# Altium PCB CAN_Interface_Board.PcbDoc
Units mm, origin at the board's own origin, x right, y up, seen from the top; angles counter-clockwise.
Board outline 50 x 50 mm, 2 copper layers (Top Layer, Bottom Layer); 48 components, 37 nets, 249 pads, 4 vias.
Unrouted connection lines stored in the file: 127.
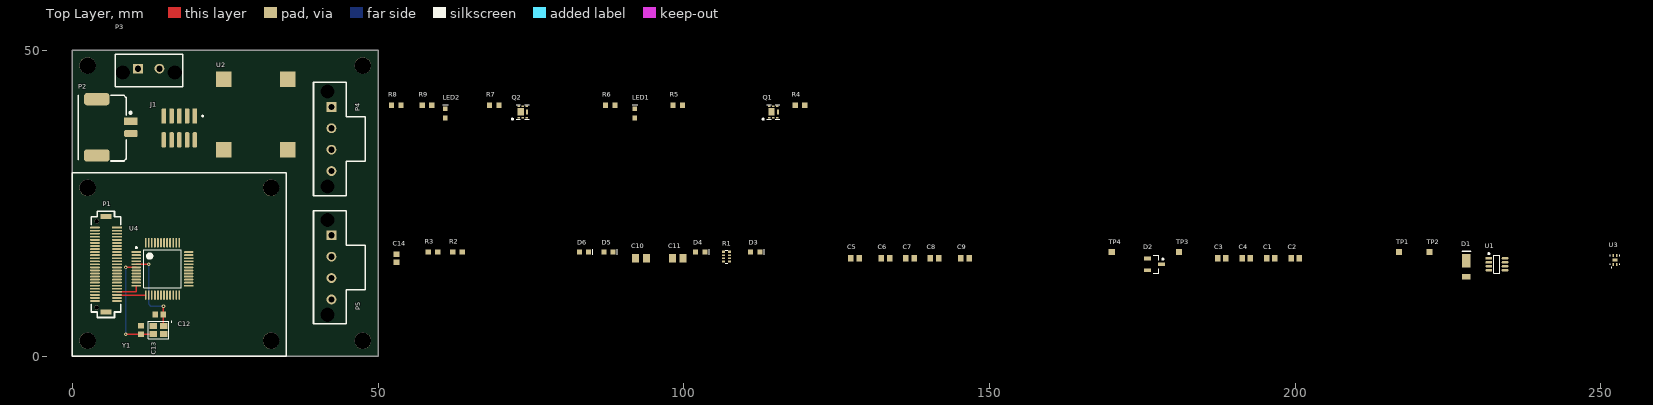
[diagram p0: Top Layer view]
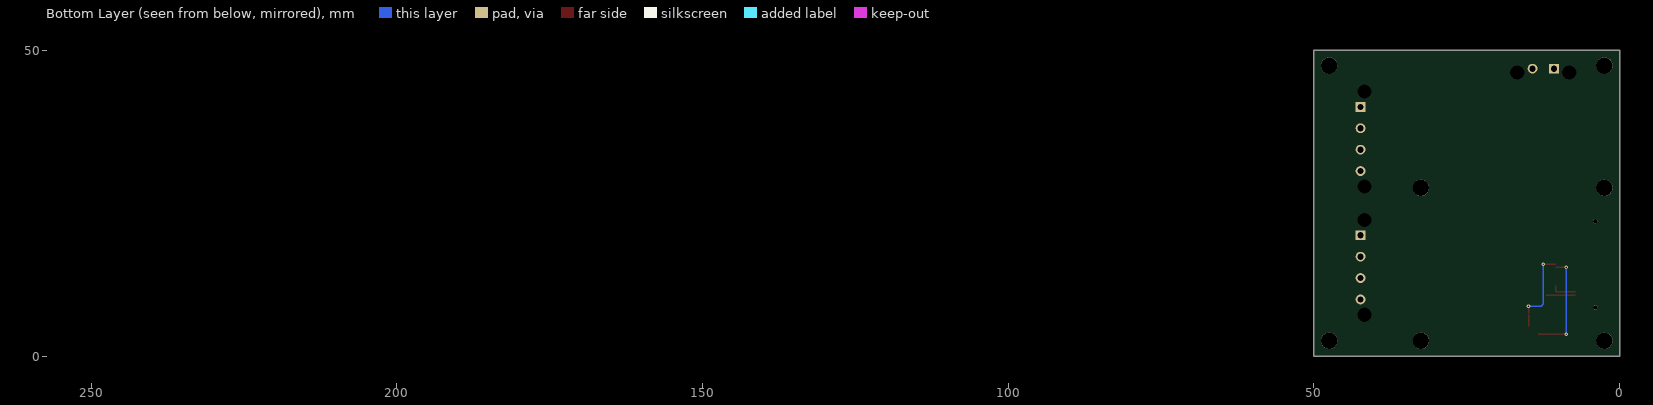
[diagram p1: Bottom Layer view, seen from below]

## Layer stack, top to bottom
Top Solder: solder mask 0.0102, Solder Resist, Dk 3.5
Top Layer: signal copper 0.0356
Dielectric 1: dielectric 0.32, FR-4, Dk 4.8
Bottom Layer: signal copper 0.0356
Bottom Solder: solder mask 0.0102, Solder Resist, Dk 3.5

## Board outline
0,0 0,50 50,50 50,0

## Design rules (kind name [scope] priority, off if disabled: settings)
BoardOutlineClearance [All] p1: gap=0.406 ignorepadtopadclearanceinfootprint=FALSE
Clearance [All] p1: gap=0.152 ignorepadtopadclearanceinfootprint=FALSE except(0: Arc-Hole Track-Hole SMDPad-Hole THPad-Hole Via-Hole Fill-Hole Poly-Hole Region-Hole Text-Hole)
ComponentClearance ComponentClearance_ControllerBoard [InComponent('P1') vs Identifier = 'Controller-Board'] p1: gap=0 collisioncheckmode=3 verticalgap=0 showdistances=FALSE
ComponentClearance ComponentClearance_Standoffs [Identifier = 'Standoff' vs Identifier = 'Controller-Board'] p2: gap=0 collisioncheckmode=3 verticalgap=0 showdistances=FALSE
ComponentClearance [All] p3: gap=0.254 collisioncheckmode=3 verticalgap=0.254 showdistances=FALSE
DiffPairsRouting [All] p1: maxlimit=0.254 minlimit=0.254 mostfreqgap=0.254 toplayer_minwidth=0.381 toplayer_maxwidth=0.381 toplayer_prefwidth=0.381 bottomlayer_minwidth=0.381 bottomlayer_maxwidth=0.381 bottomlayer_prefwidth=0.381 maxuncoupledlength=12.7
HoleSize [All] p1: absolutevalues=TRUE maxlimit=6.3 minlimit=0.3 maxpercent=80.000 minpercent=20.000
MinimumAnnularRing [All] p1: minimumring=0.152
MinimumSolderMaskSliver [All] p1: minsoldermaskwidth=0.3
PolygonConnect [IsPad] p1: connectstyle=Relief reliefconductorwidth=0.254 reliefentries=4 polygonreliefangle="90 Angle" airgapwidth=0.254
PolygonConnect PolygonConnect_NoThermal [Not(IsPad)] p2: connectstyle=Direct reliefconductorwidth=0.254 reliefentries=4 polygonreliefangle="90 Angle" airgapwidth=0.254
RoutingVias [All] p1: holewidth=0.3 width=0.6 viastyle="Through Hole" minholewidth=0.3 minwidth=0.6 maxholewidth=0.711 maxwidth=1.27
SilkToSolderMaskClearance [IsPad] p1: minsilkscreentomaskgap=0.178 clearancetoexposedcopper=TRUE
SolderMaskExpansion [All] p1: expansion=0.102
Width [All] p1: maxlimit=2.54 minlimit=0.152 preferedwidth=0.254
25 further rules are at their usual default settings.

## Classes and differential pairs
component class Pre_Charge_Interface: LED1 LED2 P4 P5 Q1 Q2 R4 R5 R6 R7 R8 R9
component class Master_Controller: C1 C2 C3 C4 C5 C6 C7 C8 C9 C10 C11 C12 C13 C14 D1 D2 D3 D4 D5 D6 J1 P2 P3 R1 R2 R3 TP1 TP2 TP3 TP4 U1 U2 U3 U4 Y1
component class Controller_Board_Interface: P1
differential pair CAN: +CAN_P -CAN_N

## Components (designator, comment, footprint, x,y, rotation, side; value= is the part's Value field where it differs from the comment)
C1 "CAP CER 1UF 50V 10% X7R 0603" "CAP, 0603" 196,16 r0 top
C2 "CAP CER 1UF 50V 10% X7R 0603" "CAP, 0603" 200,16 r0 top
C3 "CAP CER 4.7UF 25V 10% X5R 0603" "CAP, 0603" 188,16 r0 top
C4 "CAP CER 0.1UF 50V 10% X7R 0603" "CAP, 0603" 192,16 r0 top
C5 "CAP CER 0.1UF 50V 10% X7R 0603" "CAP, 0603" 128,16 r0 top
C6 "CAP CER 0.1UF 50V 10% X7R 0603" "CAP, 0603" 133,16 r0 top
C7 "CAP CER 0.1UF 50V 10% X7R 0603" "CAP, 0603" 137,16 r0 top
C8 "CAP CER 0.1UF 50V 10% X7R 0603" "CAP, 0603" 141,16 r0 top
C9 "CAP CER 0.1UF 50V 10% X7R 0603" "CAP, 0603" 146,16 r0 top
C10 "CAP CER 10uF 25V 10% X5R 0805" "CAP, 0805" 93,16 r0 top
C11 "CAP CER 10uF 25V 10% X5R 0805" "CAP, 0805" 99,16 r0 top
C12 "CAP CER 15PF 50V ±5% NPO 0603" "CAP, 0603" 14.229,6.779 r0 top
C13 "CAP CER 15PF 50V ±5% NPO 0603" "CAP, 0603" 11.25,4.25 r270 top
C14 "CAP CER 0.1UF 50V 10% X7R 0603" "CAP, 0603" 53,16 r90 top
D1 "DIODE SCHOTTKY 30V 1A POWERDI123" "DIODE SCHOTTKY 30V 1A POWERDI123" 228,13 r90 top
D2 "DIODE TVS 24VWM 70VC SOT23" SOT23 177,15 r0 top
D3 "LED BLUE CLEAR 2.8V 0603" LED_0603 111,17 r0 top
D4 "LED BLUE CLEAR 2.8V 0603" LED_0603 102,17 r0 top
D5 "LED GREEN CLEAR 2V 0603" LED_0603 87,17 r0 top
D6 "LED RED CLEAR 2V 0603" LED_0603 83,17 r0 top
J1 "CONN 10POS HEADR MALE 0.05\"" "CONN, 10POS 0.05\" Debug Header" 20.04,39.25 r180 top
LED1 "LED GREEN CLEAR 2V 0603" LED_0603 92,39 r90 top
LED2 "LED GREEN CLEAR 2V 0603" LED_0603 61,39 r90 top
P1 "CONN 50POS Bergstak Plug 0.02\"" "CONN, BERGSTAK 50 POS PLUG" 5.5,15 r0 top locked
P2 "Dura-Clik" "CONN, 2POS Dura-Click Vertical" 9.58,38.4 r270 top
P3 "CONN 2POS ULTRA-FIT 0.138\"" "CONN, 2POS ULTRA-FIT" 10.75,47 r0 top
P4 "CONN 4POS ULTRA-FIT 0.138\"" "CONN, 4POS ULTRA-FIT" 42.38,40.75 r270 top
P5 "CONN 4POS ULTRA-FIT 0.138\"" "CONN, 4POS ULTRA-FIT" 42.38,19.75 r270 top
Q1 "MOSFET N-CH 30V 8.7A 2.1W 6-PQFN (2x2)" "MOSFET N-CH 30V 12A 2mmx2mm PQFN" 114,39 r0 top
Q2 "MOSFET N-CH 30V 8.7A 2.1W 6-PQFN (2x2)" "MOSFET N-CH 30V 12A 2mmx2mm PQFN" 73,39 r0 top
R1 "RES ARRAY 510 OHM 5% 4RES" "RES ARRAY 4 POS 0804" 108,16 r0 top
R2 "RES 100K OHM 5% 1/8W 0603" "RES, 0603" 63,17 r0 top
R3 "RES 510 OHM 5% 1/10W 0603" "RES, 0603" 59,17 r0 top
R4 "RES 100 OHM 1% 1/10W 0603" "RES, 0603" 119,41 r0 top
R5 "RES 4.7K OHM 1% 1/10W 0603" "RES, 0603" 99,41 r0 top
R6 "RES 100 OHM 1% 1/10W 0603" "RES, 0603" 88,41 r0 top
R7 "RES 4.7K OHM 1% 1/10W 0603" "RES, 0603" 69,41 r0 top
R8 "RES 10K OHM 1% 1/10W 0603" "RES, 0603" 53,41 r0 top
R9 "RES 10K OHM 1% 1/10W 0603" "RES, 0603" 58,41 r0 top
TP1 "Test Point" "Test Point" 217,17 r90 top
TP2 "Test Point" "Test Point" 222,17 r90 top
TP3 "Test Point" "Test Point" 181,17 r90 top
TP4 "Test Point" "Test Point" 170,17 r90 top
U1 "IC CAN Tranceiver TCAN332DR" TSOP65P280X145-8N 233,15 r0 top
U2 "IC DCDC 3.3V 0.5A 4-SMD" "IC DCDC 3.3V 0.5A 4-SMD" 24.75,45.25 r0 top
U3 "IC REG LDO 3V 0.2A 4-TDFN" "IC REG LDO 3V 0.2A 4-TDFN" 252,15 r0 top
U4 "IC MCU 32BIT 128KB FLASH 48LQFP" TSQFP50P890X890X160-48M 14.75,14.25 r0 top
Y1 "CRYSTAL 32 MHz 8pF 4-SMD" "CX2520DB CRYSTAL" 14.929,4.9 r180 top

## Footprints (in the part's own frame and the unit in brackets; to place one, negate y for a bottom-side part, rotate by r counter-clockwise, add the part's x,y. Pads: shape width x height; smd on the part's side, far side on the other; paste and mask are expansions set on the pad)
"CAP, 0603" [mm] "Chip Capacitor, 2-Leads, Body 1.60x0.81mm, IPC Medium Density"
  rect 0.9x1 smd mask+0.076: 1(-0.675,0) 2(0.675,0)
  body extent -0.87,-0.48 0.87,0.48, height 0.9
"CAP, 0805" [mm] "Chip Capacitor, 2-Leads, Body 2.00x1.25mm, IPC Medium Density"
  rect 1.15x1.4 smd: 1(-0.875,0) 2(0.875,0)
  body extent -1,-0.63 1,0.63, height 1.25
"CONN, 2POS Dura-Click Vertical" [mm] "WM7169CT-ND"
  rect 1.2x2.2 smd: 1(0,0)
  rrect50% 1.2x2.2 smd: 2(2,0)
  rrect50% 2x4.2 smd: 3(-3.6,-5.58) 3(5.6,-5.58)
  silkscreen extent -4.28,-8.6 6.5,0.05, body extent -4.45,-8.63 6.45,0.52, height 8
"CONN, 2POS ULTRA-FIT" [mm] "2 Positions Header, Shrouded Connector 0.138\" (3.50mm) Through Hole Gold"
  rect 1.6x1.6 hole 1.02: 1(0,0)
  round 1.6 hole 1.02: 2(3.5,0)
  round 1.6 hole 2.3: ""(-2.5,-0.63) ""(6,-0.63)
  silkscreen extent -3.74,-2.93 7.33,2.37, body extent -3.48,-2.87 7.12,5.79, height 13.85
"CONN, 4POS ULTRA-FIT" [mm]
  rect 1.6x1.6 hole 1.02: 1(0,0)
  round 1.6 hole 1.02: 2(3.5,0) 3(7,0) 4(10.5,0)
  round 0 hole 2.3: ""(-2.5,-0.63) ""(13,-0.63)
  silkscreen extent -4,-2.93 14.5,5.53, body extent -3.54,-2.78 14.06,5.88, height 13.85
"CONN, 10POS 0.05\" Debug Header" [mm] "Amphenol 10 Positions Header Connector 0.050\" (1.27mm) Surface Mount Gold"
  rect 0.75x2.5 smd: 1(0,0)
  rrect50% 0.75x2.5 smd: 2(0,3.9) 3(1.27,0) 4(1.27,3.9) 5(2.54,0) 6(2.54,3.9) 7(3.81,0) 8(3.81,3.9) 9(5.08,0) 10(5.08,3.9)
  silkscreen extent -1.37,-0.1 -1.17,0.1, body extent -0.63,-0.84 5.72,4.66, height 4.5
"CONN, BERGSTAK 50 POS PLUG" [mm] "Bergstak 50 Position Plug"
  rect 1.6x0.3 smd: 1(1.8,6)
  oval 1.6x0.3 smd: 2(1.8,5.5) 3(1.8,5) 4(1.8,4.5) 5(1.8,4) 6(1.8,3.5) 7(1.8,3) 8(1.8,2.5) 9(1.8,2) 10(1.8,1.5) 11(1.8,1) 12(1.8,0.5) 13(1.8,0) 14(1.8,-0.5) 15(1.8,-1) 16(1.8,-1.5) 17(1.8,-2) 18(1.8,-2.5) 19(1.8,-3) 20(1.8,-3.5) 21(1.8,-4) 22(1.8,-4.5) 23(1.8,-5) 24(1.8,-5.5) 25(1.8,-6) 26(-1.8,-6) 27(-1.8,-5.5) 28(-1.8,-5) 29(-1.8,-4.5) 30(-1.8,-4) 31(-1.8,-3.5) 32(-1.8,-3) 33(-1.8,-2.5) 34(-1.8,-2) 35(-1.8,-1.5) 36(-1.8,-1) 37(-1.8,-0.5) 38(-1.8,0) 39(-1.8,0.5) 40(-1.8,1) 41(-1.8,1.5) 42(-1.8,2) 43(-1.8,2.5) 44(-1.8,3) 45(-1.8,3.5) 46(-1.8,4) 47(-1.8,4.5) 48(-1.8,5) 49(-1.8,5.5) 50(-1.8,6)
  round 0.7 hole 0.7: ""(-1.5,-7.05) ""(-1.5,7.05)
  rect 1.8x0.8 smd: ""(0,-7.8) ""(0,7.8)
  silkscreen extent -2.4,-8.7 2.4,8.7, body extent -2.3,-7.75 2.3,7.75, height 4.2
"CX2520DB CRYSTAL" [mm]
  rect 1.2x1 smd: 1(0,0) 2(1.7,0) 3(1.7,1.3) 4(0,1.3)
  silkscreen extent -1.35,-0.75 2.55,2.05, body extent -0.4,-0.35 2.1,1.65, height 0.5
"DIODE SCHOTTKY 30V 1A POWERDI123" [mm] "Diodes Incorporated DFLS130L-7"
  rect 0.9x1.4 smd: 1(0,0)
  rect 2.2x1.4 smd: 2(2.55,0)
  silkscreen extent 4.15,-0.7 4.15,0.7, body extent 0.1,-1 3.1,1, height 1
"IC DCDC 3.3V 0.5A 4-SMD" [mm] "ROF-78E3.3-0.5SMD-R"
  rect 2.5x2.5 smd: 1(0,0) 2(10.5,0) 3(10.5,-11.5) 4(0,-11.5)
  body extent -1,-12.5 11.5,1, height 4
"IC REG LDO 3V 0.2A 4-TDFN" [mm] "QFN, 4-Leads, Body 1.20x1.60mm, Pitch 0.50mm/1.40mm, Thermal Pad 0.86x0.50mm, IPC Medium Density"
  rect 0.25x0.5 smd: 1(0,0) 2(0.6,0) 3(0.6,1.44) 4(0,1.44)
  rect 0.86x0.5 smd: 5(0.3,0.715)
  silkscreen extent -0.48,-0.56 1.07,1.54, body extent -0.33,-0.11 0.92,1.54, height 0.6
LED_0603 [mm]
  rect 0.8x0.8 smd: 1(-0.05,0.01) 2(1.45,0.01)
  silkscreen extent 2.13,-0.46 2.13,0.45, body extent -0.09,-0.39 1.51,0.41, height 0.8
"MOSFET N-CH 30V 12A 2mmx2mm PQFN" [mm] "PQFN, 6-Leads, Body 2.00x2.00mm, Pitch 0.65mm/0.50mm, Thermal Pad 1.00x1.20mm, IPC Medium Density"
  rect 0.4x0.25 smd: 1(0,0) 2(0.65,0) 3(1.3,0) 4(1.3,1.85) 5(0.65,1.85) 6(0,1.85)
  rect 1x1.2 smd: 7(0.35,0.925)
  rect 0.3x0.79 smd: 8(1.39,0.925)
  silkscreen extent -1.14,-0.38 1.7,2.12, body extent -0.4,-0.13 1.7,1.97, height 1
"RES ARRAY 4 POS 0804" [mm] "Panasonic Electronic Components EXB-N8V511JX"
  rect 0.5x0.35 smd: 1(-1.5,1.05) 4(-1.5,-0.55) 5(-0.5,-0.55) 8(-0.5,1.05)
  rect 0.5x0.25 smd: 2(-1.5,0.5) 3(-1.5,0) 6(-0.5,0) 7(-0.5,0.5)
  silkscreen extent -1.22,-0.82 -0.77,1.33, body extent -1.5,-0.75 -0.5,1.25, height 0.36
"RES, 0603" [mm] "Chip Resistor, 2-Leads, Body 1.60x0.80mm, IPC Medium Density"
  rect 0.85x0.85 smd: 1(-0.775,0) 2(0.775,0)
  body extent -0.8,-0.4 0.8,0.4, height 0.55
SOT23 [mm] "SOT23, 3-Leads, Body 2.9x1.3mm, Pitch 0.95mm, Lead Span 2.3mm - Reverse Pinning, IPC Medium Density"
  rect 1.15x0.6 smd: 1(1.125,0) 2(-1.125,-0.95) 3(-1.125,0.95)
  silkscreen extent -0.2,-1.5 1.48,1.5, body extent -0.7,-1.5 0.7,1.5, height 1.1
"Test Point" [mm]
  rect 1x1 smd paste-2: TP(0,0)
TSOP65P280X145-8N [mm] "TSOP, 8-Leads, Body 2.90x1.60mm, Pitch 0.65mm, IPC Medium Density"
  rect 1.1x0.45 smd: 1(-1.325,0.975)
  oval 1.1x0.45 smd: 2(-1.325,0.325) 3(-1.325,-0.325) 4(-1.325,-0.975) 5(1.325,-0.975) 6(1.325,-0.325) 7(1.325,0.325) 8(1.325,0.975)
  silkscreen extent -1.45,-1.5 0.5,1.87, body extent -1.39,-1.5 1.39,1.5, height 1.45
TSQFP50P890X890X160-48M [mm] "TSQFP, 48-Leads, Body 7.00x7.00mm, Pitch 0.50mm, IPC Low Density"
  rect 1.55x0.3 smd: 1(-4.275,2.75)
  oval 1.55x0.3 smd: 2(-4.275,2.25) 3(-4.275,1.75) 4(-4.275,1.25) 5(-4.275,0.75) 6(-4.275,0.25) 7(-4.275,-0.25) 8(-4.275,-0.75) 9(-4.275,-1.25) 10(-4.275,-1.75) 11(-4.275,-2.25) 12(-4.275,-2.75) 25(4.275,-2.75) 26(4.275,-2.25) 27(4.275,-1.75) 28(4.275,-1.25) 29(4.275,-0.75) 30(4.275,-0.25) 31(4.275,0.25) 32(4.275,0.75) 33(4.275,1.25) 34(4.275,1.75) 35(4.275,2.25) 36(4.275,2.75)
  oval 0.3x1.55 smd: 13(-2.75,-4.275) 14(-2.25,-4.275) 15(-1.75,-4.275) 16(-1.25,-4.275) 17(-0.75,-4.275) 18(-0.25,-4.275) 19(0.25,-4.275) 20(0.75,-4.275) 21(1.25,-4.275) 22(1.75,-4.275) 23(2.25,-4.275) 24(2.75,-4.275) 37(2.75,4.275) 38(2.25,4.275) 39(1.75,4.275) 40(1.25,4.275) 41(0.75,4.275) 42(0.25,4.275) 43(-0.25,4.275) 44(-0.75,4.275) 45(-1.25,4.275) 46(-1.75,4.275) 47(-2.25,4.275) 48(-2.75,4.275)
  silkscreen extent -4.4,-3.1 3.1,3.6, body extent -4.45,-4.45 4.45,4.45, height 1.6

## Part data
C1 C2: "1µF ±10% 50V Ceramic Capacitor X7R 0603 (1608 Metric)", Capacitance=1µF, Manufacturer 1="Taiyo Yuden", Manufacturer Part Number 1=UMK107AB7105KA-T, Operating Temperature="-55°C ~ 125°C", Package / Case="0603 (1608 Metric)", Ratings=-, Supplier Part Number 1=587-3247-1-ND, Temperature Coefficient=X7R, Tolerance=±10%, Voltage=50V, ComponentLink1Description=http://www.yuden.co.jp/productdata/catalog/en/mlcc_all_e.pdf, ComponentLink1URL=http://www.yuden.co.jp/productdata/catalog/en/mlcc_all_e.pdf, Height - Seated (Max)=-, Lead Spacing=-, Lead Style=-, Mounting Type="Surface Mount, MLCC", Packaging="Cut Tape (CT)", Part Status=Active, Size / Dimension="0.063\" L x 0.031\" W (1.60mm x 0.80mm)", Supplier 1=Digi-Key, Thickness (Max)="0.037\" (0.95mm)"
C3: "4.7µF ±10% 25V Ceramic Capacitor X5R 0603 (1608 Metric)", Capacitance=4.7µF, Manufacturer 1="Murata Electronics North America", Manufacturer Part Number 1=GRM188R61E475KE11D, Operating Temperature="-55°C ~ 85°C", Package / Case="0603 (1608 Metric)", Ratings=-, Supplier Part Number 1=490-7203-1-ND, Temperature Coefficient=X5R, Tolerance=±10%, Voltage=25V, ComponentLink1Description=http://www.murata.com/~/media/webrenewal/support/library/catalog/products/capacitor/mlcc/c02e.ashx, ComponentLink1URL=http://www.murata.com/~/media/webrenewal/support/library/catalog/products/capacitor/mlcc/c02e.ashx, Height - Seated (Max)=-, Lead Spacing=-, Lead Style=-, Mounting Type="Surface Mount, MLCC", Packaging="Cut Tape (CT)", Part Status=Active, Size / Dimension="0.063\" L x 0.031\" W (1.60mm x 0.80mm)", Supplier 1=Digi-Key, Thickness (Max)="0.031\" (0.80mm)"
C4 C5 C6 C7 C8 C9 C14: "0.10µF ±10% 50V Ceramic Capacitor X7R 0603 (1608 Metric)", Capacitance=0.1µF, Manufacturer 1="AVX Corporation", Manufacturer Part Number 1=06035C104KAT2A, Operating Temperature="-55°C ~ 125°C", Package / Case="0603 (1608 Metric)", Ratings=-, Supplier Part Number 1=478-5052-1-ND, Temperature Coefficient=X7R, Tolerance=±10%, Voltage=50V, ComponentLink1Description=http://datasheets.avx.com/X7RDielectric.pdf, ComponentLink1URL=http://datasheets.avx.com/X7RDielectric.pdf, Height - Seated (Max)=-, Lead Spacing=-, Lead Style=-, Mounting Type="Surface Mount, MLCC", Packaging="Cut Tape (CT)", Part Status=Active, Size / Dimension="0.063\" L x 0.032\" W (1.60mm x 0.81mm)", Supplier 1=Digi-Key, Thickness (Max)="0.035\" (0.90mm)"
C10 C11: "10µF ±10% 25V Ceramic Capacitor X5R 0805 (2012 Metric)", Capacitance=10µF, Manufacturer="Murata Electronics North America", Manufacturer Part Number=GRM21BR61E106KA73L, Operating Temperature="-55°C ~ 85°C", Package / Case="0805 (2012 Metric)", Ratings=-, Supplier Part Number 1=490-5523-1-ND, Temperature Coefficient=X5R, Tolerance=±10%, Voltage - Rated=25V, Applications="General Purpose", Category=Capacitors, ComponentLink1Description=http://search.murata.co.jp/Ceramy/image/img/A01X/G101/ENG/GRM21BR61E106KA73-01.pdf, ComponentLink1URL=http://search.murata.co.jp/Ceramy/image/img/A01X/G101/ENG/GRM21BR61E106KA73-01.pdf, Features=-, Height - Seated (Max)=-, Lead Spacing=-, Lead Style=-, Mounting Type="Surface Mount, MLCC", Packaging="Cut Tape (CT)", Part Status=Active, Pricing 1="1=0.3, 10=0.214, 100=0.1008, 500=0.07068, 1000=0.05851 (CAD)", RoHS="RoHS Compliant", Size / Dimension="0.079\" L x 0.049\" W (2.00mm x 1.25mm)", Stock 1=1695157, Supplier 1=Digi-Key, Thickness (Max)="0.053\" (1.35mm)"
C12 C13: "15pF ±5% 50V Ceramic Capacitor C0G, NP0 0603 (1608 Metric)", Capacitance=15pF, Manufacturer 1=Yageo, Manufacturer Part Number 1=CC0603JRNPO9BN150, Operating Temperature="-55°C ~ 125°C", Package / Case="0603 (1608 Metric)", Ratings=-, Supplier Part Number 1=311-1060-1-ND, Temperature Coefficient="C0G, NP0", Tolerance=±5%, Voltage=50V, ComponentLink1Description=http://www.yageo.com/documents/recent/UPY-GP_NP0_16V-to-50V_16.pdf, ComponentLink1URL=http://www.yageo.com/documents/recent/UPY-GP_NP0_16V-to-50V_16.pdf, Failure Rate=-, Height - Seated (Max)=-, Lead Spacing=-, Lead Style=-, Mounting Type="Surface Mount, MLCC", Packaging="Cut Tape (CT)", Part Status=Active, Size / Dimension="0.063\" L x 0.031\" W (1.60mm x 0.80mm)", Supplier 1=Digi-Key, Thickness (Max)="0.035\" (0.90mm)"
D1: "Diode Schottky 30V 1A Surface Mount PowerDI™ 123", Capacitance @ Vr, F="76pF @ 10V, 1MHz", Current - Average Rectified (Io)=1A, Current - Reverse Leakage @ Vr="1mA @ 30V", Manufacturer="Diodes Incorporated", Manufacturer Part Number=DFLS130L-7, Operating Temperature - Junction="-40°C ~ 125°C", Package / Case=POWERDI®123, Supplier Device Package="PowerDI™ 123", Supplier Part Number 1=DFLS130LDICT-ND, Voltage - DC Reverse (Vr) (Max)=30V, Voltage - Forward (Vf) (Max) @ If="310mV @ 1A", Category="Discrete Semiconductor Products", ComponentLink1Description=https://www.diodes.com/assets/Datasheets/ds30492.pdf, ComponentLink1URL=https://www.diodes.com/assets/Datasheets/ds30492.pdf, Diode Type=Schottky, Mounting Type="Surface Mount", Packaging="Cut Tape (CT)", Part Status=Active, Pricing 1="1=0.7, 10=0.599, 100=0.447, 500=0.35126, 1000=0.27142 (CAD)", RoHS="RoHS Compliant", Speed="Fast Recovery =< 500ns, > 200mA (Io)", Stock 1=68200, Supplier 1=Digi-Key
D2: "TVS DIODE 24VWM 70VC SOT23", Capacitance @ Frequency="11pF @ 1MHz", Current - Peak Pulse (10/1000µs)="3A (8/20µs)", Manufacturer 1="Nexperia USA Inc.", Manufacturer Part Number 1=PESD1CAN,215, Operating Temperature="-65°C ~ 150°C (TA)", Package / Case="TO-236-3, SC-59, SOT-23-3", Power - Peak Pulse=200W, Power Line Protection=No, Supplier Device Package="SOT-23 (TO-236AB)", Supplier Part Number 1=1727-3817-1-ND, Voltage - Breakdown (Min)=25.4V, Voltage - Clamping (Max) @ Ipp=70V, ComponentLink1Description=http://assets.nexperia.com/documents/data-sheet/PESD1CAN.pdf, ComponentLink1URL=http://assets.nexperia.com/documents/data-sheet/PESD1CAN.pdf, Mounting Type="Surface Mount", Packaging="Cut Tape (CT)", Part Status=Active, Supplier 1=Digi-Key, Type=Zener
D3 D4: "Blue 470nm LED Indication - Discrete 2.8V 0603 (1608 Metric)", Color=Blue, Current - Test=5mA, Lens Color=Colorless, Manufacturer 1="Lite-On Inc.", Manufacturer Part Number 1=LTST-C193TBKT-5A, Millicandela Rating=15mcd, Package / Case="0603 (1608 Metric)", Supplier Device Package="Chip LED", Supplier Part Number 1=160-1827-1-ND, Voltage - Forward (Vf) (Typ)=2.8V, ComponentLink1Description=http://optoelectronics.liteon.com/upload/download/DS22-2004-060/P_100_LTST-C193TBKT-5A.pdf, ComponentLink1URL=http://optoelectronics.liteon.com/upload/download/DS22-2004-060/P_100_LTST-C193TBKT-5A.pdf, Height (Max)=0.45mm, Lens Style/Size="Rectangle with Flat Top, 1.15mm x 0.80mm", Lens Transparency=Clear, Mounting Type="Surface Mount", Packaging="Cut Tape (CT)", Part Status=Active, Size / Dimension="1.60mm L x 0.80mm W", Supplier 1=Digi-Key, Viewing Angle=130°, Wavelength - Dominant=470nm, Wavelength - Peak=468nm
D5 LED1 LED2: "Green 572nm LED Indication - Discrete 2V 0603 (1608 Metric)", Color=Green, Current - Test=20mA, Lens Color=Colorless, Manufacturer="Wurth Electronics Inc.", Manufacturer Part Number=150060VS75000, Millicandela Rating=40mcd, Package / Case="0603 (1608 Metric)", Supplier Device Package=0603, Supplier Part Number 1=732-4980-1-ND, Voltage - Forward (Vf) (Typ)=2V, Category=Optoelectronics, ComponentLink1Description=http://katalog.we-online.de/led/datasheet/150060VS75000.pdf, ComponentLink1URL=http://katalog.we-online.de/led/datasheet/150060VS75000.pdf, Features=-, Height (Max)=0.80mm, Lens Style/Size="Rectangle with Flat Top, 1.10mm x 0.70mm", Lens Transparency=Clear, Mounting Type="Surface Mount", Packaging="Cut Tape (CT)", Part Status=Active, Pricing 1="1=0.21, 100=0.1617, 500=0.13964 (CAD)", RoHS="RoHS Compliant", Size / Dimension="1.60mm L x 0.80mm W", Stock 1=9408, Supplier 1=Digi-Key, Viewing Angle=140°, Wavelength - Dominant=570nm, Wavelength - Peak=572nm
D6: "Red 631nm LED Indication - Discrete 2V 0603 (1608 Metric)", Color=Red, Current - Test=20mA, Lens Color=Colorless, Manufacturer="Wurth Electronics Inc.", Manufacturer Part Number=150060RS75000, Millicandela Rating=250mcd, Package / Case="0603 (1608 Metric)", Supplier Device Package=0603, Supplier Part Number 1=732-4978-1-ND, Voltage - Forward (Vf) (Typ)=2V, Category=Optoelectronics, ComponentLink1Description=http://katalog.we-online.de/led/datasheet/150060RS75000.pdf, ComponentLink1URL=http://katalog.we-online.de/led/datasheet/150060RS75000.pdf, Features=-, Height (Max)=0.80mm, Lens Style/Size="Rectangle with Flat Top, 1.10mm x 0.70mm", Lens Transparency=Clear, Mounting Type="Surface Mount", Packaging="Cut Tape (CT)", Part Status=Active, Pricing 1="1=0.21, 100=0.1617, 500=0.13964 (CAD)", RoHS="RoHS Compliant", Size / Dimension="1.60mm L x 0.80mm W", Stock 1=35521, Supplier 1=Digi-Key, Viewing Angle=140°, Wavelength - Dominant=625nm, Wavelength - Peak=630nm
J1: "10 Positions Header Connector 0.050\" (1.27mm) Surface Mount Gold", Current Rating=-, Insulation Color=Black, Manufacturer 1="Amphenol FCI", Manufacturer Part Number 1=20021121-00010C4LF, Material Flammability Rating="UL94 V-0", Supplier Part Number 1=609-3695-1-ND, ComponentLink1Description=http://portal.fciconnect.com/Comergent//fci/drawing/20021121.pdf, ComponentLink1URL=http://portal.fciconnect.com/Comergent//fci/drawing/20021121.pdf, Connector Type=Header, Contact Finish - Mating=Gold, Contact Finish - Post=Tin, Contact Finish Thickness - Mating="10µin (0.25µm)", Contact Finish Thickness - Post="50µin (1.27µm)", Contact Length - Mating="0.120\" (3.05mm)", Contact Length - Post=-, Contact Material="Copper Alloy", Contact Shape=Square, Contact Type="Male Pin", Fastening Type=-, Ingress Protection=-, Insulation Height=-, Insulation Material=Thermoplastic, Mated Stacking Heights=-, Mounting Type="Surface Mount", Number of Positions=10, Number of Positions Loaded=All, Number of Rows=2, Operating Temperature=-, Overall Contact Length=-, Packaging="Cut Tape (CT)", Part Status=Active, Pitch - Mating="0.050\" (1.27mm)", Row Spacing - Mating="0.050\" (1.27mm)", Shrouding=Unshrouded, Style="Board to Board", Supplier 1=Digi-Key, Termination=Solder, Voltage=-
P1: "50 Position Connector Plug, Outer Shroud Contacts Surface Mount Gold", Manufacturer 1="Amphenol FCI", Manufacturer Part Number 1=10132797-055100LF, Supplier Part Number 1=609-5226-1-ND, ComponentLink1Description=http://portal.fciconnect.com/Comergent//fci/drawing/10132797.pdf, ComponentLink1URL=http://portal.fciconnect.com/Comergent//fci/drawing/10132797.pdf, Connector Type="Plug, Outer Shroud Contacts", Contact Finish=Gold, Contact Finish Thickness="1µin (0.025µm)", Height Above Board="0.169\" (4.30mm)", Mated Stacking Heights=5mm, Mounting Type="Surface Mount", Number of Positions=50, Number of Rows=2, Packaging="Cut Tape (CT)", Part Status=Active, Pitch="0.020\" (0.50mm)", Series="BergStak Plug", Supplier 1=Digi-Key
P2: library part "CONN 2POS DURA-CLIK 0.079\" VERT", "2 Positions Header, Shrouded Connector 0.079\" (2.00mm) Surface Mount, Vertical Tin", Current Rating=-, Insulation Color=Natural, Manufacturer="Molex, LLC", Manufacturer Part Number=5600200220, Supplier Part Number 1=WM10862CT-ND, Applications="Automotive, Industrial", Category="Connectors, Interconnects", ComponentLink1Description=http://www.molex.com/pdm_docs/sd/5600200220_sd.pdf, ComponentLink1URL=http://www.molex.com/pdm_docs/sd/5600200220_sd.pdf, Connector Type=Header, Contact Finish - Mating=Tin, Contact Finish - Post=Tin, Contact Finish Thickness - Mating=-, Contact Finish Thickness - Post=-, Contact Length - Mating=-, Contact Length - Post=-, Contact Material="Copper Alloy", Contact Shape=Square, Contact Type="Male Pin", Fastening Type="Latch Lock", Features="Solder Retention", Ingress Protection=-, Insulation Height="0.315\" (8.00mm)", Insulation Material="Polyamide (PA), Nylon", Mated Stacking Heights=9.3mm, Material Flammability Rating=-, Mounting Type="Surface Mount", Number of Positions=2, Number of Positions Loaded=All, Number of Rows=1, Operating Temperature=-, Overall Contact Length=-, Packaging="Cut Tape (CT)", Part Status=Active, Pitch - Mating="0.079\" (2.00mm)", Pricing 1="1=1.16, 10=1.012, 25=0.952, 50=0.9122, 100=0.8727, 250=0.79336 (CAD)", RoHS="RoHS Compliant", Row Spacing - Mating=-, Shrouding="Shrouded - 4 Wall", Stock 1=11912, Style="Board to Cable/Wire", Supplier 1=Digi-Key, Termination=Solder, Voltage Rating=-
P3: "2 Positions Header, Shrouded Connector 0.138\" (3.50mm) Through Hole Gold", Current Rating=-, Insulation Color=Black, Manufacturer 1="Molex, LLC", Manufacturer Part Number 1=1722861302, Material Flammability Rating="UL94 V-0", Operating Temperature="-40°C ~ 120°C", Supplier Part Number 1=WM11673-ND, Voltage=400V, ComponentLink1Description=http://www.molex.com/pdm_docs/sd/1722861302_sd.pdf, ComponentLink1URL=http://www.molex.com/pdm_docs/sd/1722861302_sd.pdf, Connector Type=Header, Contact Finish - Mating=Gold, Contact Finish - Post=Tin, Contact Finish Thickness - Mating="30µin (0.76µm)", Contact Finish Thickness - Post="60µin (1.52µm)", Contact Length - Mating=-, Contact Length - Post="0.126\" (3.20mm)", Contact Material="Copper Alloy", Contact Shape=Square, Contact Type="Male Pin", Fastening Type="Latch Holder", Ingress Protection=-, Insulation Height="0.465\" (11.80mm)", Insulation Material="Liquid Crystal Polymer (LCP)", Mated Stacking Heights=26.99mm, Mounting Type="Through Hole", Number of Positions=2, Number of Positions Loaded=All, Number of Rows=1, Overall Contact Length=-, Packaging=Tray, Part Status=Active, Pitch - Mating="0.138\" (3.50mm)", Row Spacing - Mating=-, Series=UltraFit, Shrouding="Shrouded - 4 Wall", Style="Board to Board or Cable", Supplier 1=Digi-Key, Termination="Kinked Pin, Solder"
P4 P5: "4 Positions Header Connector 0.138\" (3.50mm) Through Hole Tin", Current Rating=-, Insulation Color=Black, Manufacturer 1="Molex, LLC", Manufacturer Part Number 1=1722871104, Material Flammability Rating="UL94 V-0", Operating Temperature="-40°C ~ 105°C", Supplier Part Number 1=WM11703-ND, Voltage=400V, ComponentLink1Description=http://www.molex.com/pdm_docs/sd/1722871104_sd.pdf, ComponentLink1URL=http://www.molex.com/pdm_docs/sd/1722871104_sd.pdf, Connector Type=Header, Contact Finish - Mating=Tin, Contact Finish - Post=Tin, Contact Finish Thickness - Mating="60µin (1.52µm)", Contact Finish Thickness - Post="60µin (1.52µm)", Contact Length - Mating=-, Contact Length - Post="0.126\" (3.20mm)", Contact Material="Copper Alloy", Contact Shape=Square, Contact Type="Male Pin", Fastening Type="Latch Holder", Ingress Protection=-, Insulation Height="0.465\" (11.80mm)", Insulation Material="Liquid Crystal Polymer (LCP)", Mated Stacking Heights=26.99mm, Mounting Type="Through Hole", Number of Positions=4, Number of Positions Loaded=All, Number of Rows=1, Overall Contact Length=-, Packaging=Tray, Part Status=Active, Pitch - Mating="0.138\" (3.50mm)", Row Spacing - Mating=-, Series=UltraFit, Shrouding="Shrouded - 4 Wall", Style="Board to Cable/Wire", Supplier 1=Digi-Key, Termination=Solder
Q1 Q2: Current - Continuous Drain (Id) @ 25°C=8.7A, Drain to Source Voltage (Vdss)=30V, Drive Voltage (Max Rds On,  Min Rds On)="2.5V, 4.5V", Input Capacitance (Ciss) (Max) @ Vds="1019pF @ 25V", Manufacturer 1="Infineon Technologies", Manufacturer Part Number 1=IRLHS6342TRPBF, Operating Temperature="-55°C ~ 150°C (TJ)", Package / Case=6-PowerVDFN, Power Dissipation (Max)=2.1W, Supplier Device Package="6-PQFN (2x2)", Supplier Part Number 1=IRLHS6342TRPBFCT-ND, Category="Discrete Semiconductor Products", ComponentLink1Description=http://www.infineon.com/dgdl/irlhs6342pbf.pdf?fileId=5546d462533600a401535663b52625ad, ComponentLink1URL=http://www.infineon.com/dgdl/irlhs6342pbf.pdf?fileId=5546d462533600a401535663b52625ad, Description 1="MOSFET N-CH 30V 8.7A 2X2 PQFN", FET Feature=-, FET Type=N-Channel, Gate Charge (Qg) (Max) @ Vgs="11nC @ 4.5V", Mounting Type="Surface Mount", Packaging="Cut Tape (CT)", Part Status=Active, Pricing 1="1=0.79, 10=0.685, 100=0.5118, 500=0.4022, 1000=0.31079 (CAD)", Rds On (Max) @ Id, Vgs="15.5 mOhm @ 8.5A, 4.5V", RoHS="RoHS Compliant", Stock 1=9984, Supplier 1=Digi-Key, Technology="MOSFET (Metal Oxide)", Vgs (Max)=±12V, Vgs(th) (Max) @ Id="1.1V @ 10µA"
R1: library part "RES ARRAY 510 OHM 5% 4RES EXB-N8V511JX", "RES ARRAY SMD 510 OHM 5% 4RES EXB-N8V511JX", Manufacturer="Panasonic Electronic Components", Manufacturer Part Number=EXB-N8V511JX, Operating Temperature="-55°C ~ 125°C", Package / Case="0804, Concave, Long Side Terminals", Power Per Element=31mW, Resistance (Ohms)=510, Supplier Device Package=0804, Supplier Part Number 1=Y10511CT-ND, Temperature Coefficient=±200ppm/°C, Tolerance=±5%, Applications=-, Category=Resistors, Circuit Type=Isolated, ComponentLink1Description=https://industrial.panasonic.com/cdbs/www-data/pdf/AOC0000/AOC0000C14.pdf, ComponentLink1URL=https://industrial.panasonic.com/cdbs/www-data/pdf/AOC0000/AOC0000C14.pdf, Height - Seated (Max)="0.022\" (0.55mm)", Mounting Type="Surface Mount", Packaging="Cut Tape (CT)", Part Status=Active, Pricing 1="1=0.15, 10=0.101, 25=0.0696, 50=0.0544, 100=0.0389, 250=0.03024, 500=0.02404, 1000=0.01706, 5000=0.01319 (CAD)", RoHS="RoHS Compliant", Size / Dimension="0.079\" L x 0.039\" W (2.00mm x 1.00mm)", Stock 1=25621, Supplier 1=Digi-Key
R2: "RES SMD 100K OHM 5% 1/10W 0603", Manufacturer 1=Yageo, Manufacturer Part Number 1=RC0603JR-07100KL, Operating Temperature="-55°C ~ 155°C", Package / Case="0603 (1608 Metric)", Power=1/10W, Resistance=100k, Supplier Device Package=0603, Supplier Part Number 1=311-100KGRCT-ND, Temperature Coefficient=±100ppm/°C, Tolerance=±5%, ComponentLink1Description=http://www.yageo.com/documents/recent/PYu-RC_Group_51_RoHS_L_7.pdf, ComponentLink1URL=http://www.yageo.com/documents/recent/PYu-RC_Group_51_RoHS_L_7.pdf, Composition="Thick Film", Failure Rate=-, Height - Seated (Max)="0.022\" (0.55mm)", Packaging="Cut Tape (CT)", Part Status=Active, Size / Dimension="0.063\" L x 0.031\" W (1.60mm x 0.80mm)", Supplier 1=Digi-Key
R3: "RES SMD 510 OHM 5% 1/10W 0603", Manufacturer 1=Yageo, Manufacturer Part Number 1=RC0603JR-07510RL, Operating Temperature="-55°C ~ 155°C", Package / Case="0603 (1608 Metric)", Power=1/10W, Resistance=510, Supplier Device Package=0603, Supplier Part Number 1=311-510GRCT-ND, Temperature Coefficient=±100ppm/°C, Tolerance=±5%, ComponentLink1Description=http://www.yageo.com/documents/recent/PYu-RC_Group_51_RoHS_L_7.pdf, ComponentLink1URL=http://www.yageo.com/documents/recent/PYu-RC_Group_51_RoHS_L_7.pdf, Composition="Thick Film", Failure Rate=-, Height - Seated (Max)="0.022\" (0.55mm)", Packaging="Cut Tape (CT)", Part Status=Active, Size / Dimension="0.063\" L x 0.031\" W (1.60mm x 0.80mm)", Supplier 1=Digi-Key
R4 R6: "100 Ohm ±1% 0.1W, 1/10W Chip Resistor 0603 (1608 Metric) Moisture Resistant Thick Film", Manufacturer 1=Yageo, Manufacturer Part Number 1=RC0603FR-07100RL, Operating Temperature="-55°C ~ 155°C", Package / Case="0603 (1608 Metric)", Power=1/10W, Resistance=100, Supplier Device Package=0603, Supplier Part Number 1=311-100HRCT-ND, Temperature Coefficient=±100ppm/°C, Tolerance=±1%, ComponentLink1Description=http://www.yageo.com/documents/recent/PYu-RC_Group_51_RoHS_L_7.pdf, ComponentLink1URL=http://www.yageo.com/documents/recent/PYu-RC_Group_51_RoHS_L_7.pdf, Composition="Thick Film", Failure Rate=-, Height - Seated (Max)="0.022\" (0.55mm)", Packaging="Cut Tape (CT)", Part Status=Active, Size / Dimension="0.063\" L x 0.031\" W (1.60mm x 0.80mm)", Supplier 1=Digi-Key
R5 R7: "4.7k Ohm ±1% 0.1W, 1/10W Chip Resistor 0603 (1608 Metric) Moisture Resistant Thick Film", Manufacturer 1=Yageo, Manufacturer Part Number 1=RC0603FR-074K7L, Operating Temperature="-55°C ~ 155°C", Package / Case="0603 (1608 Metric)", Power (Watts)=1/10W, Resistance (Ohms)=4.7k, Supplier Device Package=0603, Supplier Part Number 1=311-4.70KHRCT-ND, Temperature Coefficient=±100ppm/°C, Tolerance=±1%, Category=Resistors, ComponentLink1Description=http://www.yageo.com/documents/recent/PYu-RC_Group_51_RoHS_L_7.pdf, ComponentLink1URL=http://www.yageo.com/documents/recent/PYu-RC_Group_51_RoHS_L_7.pdf, Composition="Thick Film", Description 1="RES SMD 4.7K OHM 1% 1/10W 0603", Failure Rate=-, Features="Moisture Resistant", Height - Seated (Max)="0.022\" (0.55mm)", Packaging="Cut Tape (CT)", Part Status=Active, Pricing 1="1=0.16, 10=0.022, 100=0.0089, 1000=0.00402, 2500=0.00349 (CAD)", RoHS="RoHS Compliant", Size / Dimension="0.063\" L x 0.031\" W (1.60mm x 0.80mm)", Stock 1=3487566, Supplier 1=Digi-Key
R8 R9: "RES SMD 10K OHM 1% 1/10W 0603", Manufacturer 1=Yageo, Manufacturer Part Number 1=RC0603FR-0710KL, Operating Temperature="-55°C ~ 155°C", Package / Case="0603 (1608 Metric)", Power=1/10W, Resistance=10k, Supplier Device Package=0603, Supplier Part Number 1=311-10.0KHRCT-ND, Temperature Coefficient=±100ppm/°C, Tolerance=±1%, ComponentLink1Description=http://www.yageo.com/documents/recent/PYu-RC_Group_51_RoHS_L_7.pdf, ComponentLink1URL=http://www.yageo.com/documents/recent/PYu-RC_Group_51_RoHS_L_7.pdf, Composition="Thick Film", Failure Rate=-, Height - Seated (Max)="0.022\" (0.55mm)", Packaging="Cut Tape (CT)", Part Status=Active, Size / Dimension="0.063\" L x 0.031\" W (1.60mm x 0.80mm)", Supplier 1=Digi-Key
U1: "1/1 Transceiver CAN 8-SOIC", Digikey Part Number=296-43711-1-ND, Manufacturer Part Number=TCAN332DR, Supplier 1=Digi-Key, Supplier Part Number 1=296-43711-1-ND
U2: "Non-isolated PoL DC-DC Module 3.3V Output 0.5A 5-36V Input", Current - Output (Max)=500mA, Manufacturer="Recom Power", Manufacturer Part Number=ROF-78E3.3-0.5SMD-R, Operating Temperature="-40°C ~ 75°C", Package / Case="4-SMD Module", Supplier Part Number 1=945-1689-1-ND, Voltage - Input (Max)=36V, Voltage - Input (Min)=5V, Voltage - Isolation=-, Voltage - Output 1=3.3V, Applications="ITE (Commercial)", Category="Power Supplies - Board Mount", ComponentLink1Description=https://www.recom-power.com/pdf/Innoline/ROF-78Exx-0.5.pdf, ComponentLink1URL=https://www.recom-power.com/pdf/Innoline/ROF-78Exx-0.5.pdf, Efficiency=84%, Features=SCP, Mounting Type="Surface Mount", Number of Outputs=1, Packaging="Cut Tape (CT)", Part Status=Active, Pricing 1="1=4.97, 5=4.906, 10=4.836, 25=4.6944, 50=4.5516, 100=4.4094, 250=4.26728 (CAD)", RoHS="RoHS Compliant", Size / Dimension="0.53\" L x 0.49\" W x 0.18\" H (13.5mm x 12.5mm x 4.5mm)", Stock 1=2290, Supplier 1=Digi-Key, Type="Non-Isolated PoL Module", Voltage - Output 2=-, Voltage - Output 3=-
U3: Current - Limit (Min)=250mA, Current - Output=200mA, Manufacturer="Microchip Technology", Manufacturer Part Number=MIC94310-PYMT-TR, Operating Temperature="-40°C ~ 125°C", Package / Case="4-UFDFN Exposed Pad", Supplier Device Package="4-TDFN (1.2x1.6)", Supplier Part Number 1=576-4761-1-ND, Voltage - Dropout (Typical)="0.04V @ 200mA", Voltage - Input="Up to 3.6V", Voltage - Output=3V, Category="Integrated Circuits (ICs)", ComponentLink1Description=http://www.microchip.com/mymicrochip/filehandler.aspx?ddocname=en580409, ComponentLink1URL=http://www.microchip.com/mymicrochip/filehandler.aspx?ddocname=en580409, Mounting Type="Surface Mount", Packaging="Cut Tape (CT)", Part Status=Active, Pricing 1="1=0.45, 25=0.3708, 100=0.3386 (CAD)", Regulator Topology="Positive Fixed", RoHS="RoHS Compliant", Stock 1=4802, Supplier 1=Digi-Key
U4: "ARM® Cortex®-M0 STM32 F0 Microcontroller IC 32-Bit 48MHz 128KB (128K x 8) FLASH 48-LQFP (7x7)", Manufacturer 1=STMicroelectronics, Manufacturer Part Number 1=STM32F072CBT6, Operating Temperature="-40°C ~ 85°C (TA)", Package / Case=48-LQFP, Supplier Device Package="48-LQFP (7x7)", Supplier Part Number 1=497-14645-ND, Voltage - Supply (Vcc/Vdd)="1.65 V ~ 3.6 V", ComponentLink1Description=http://www.st.com/content/ccc/resource/technical/document/datasheet/cd/46/43/83/22/d3/40/c8/DM00090510.pdf/files/DM00090510.pdf/jcr:content/translations/en.DM00090510.pdf, ComponentLink1URL=http://www.st.com/content/ccc/resource/technical/document/datasheet/cd/46/43/83/22/d3/40/c8/DM00090510.pdf/files/DM00090510.pdf/jcr:content/translations/en.DM00090510.pdf, Connectivity="CAN, HDMI-CEC, I²C, IrDA, LIN, SPI, UART/USART, USB", Core Processor="ARM® Cortex®-M0", Core Size=32-Bit, Data Converters="A/D 10x12b, D/A 2x12b", EEPROM Size=-, Number of I/O=37, Oscillator Type=Internal, Packaging=Tray, Part Status=Active, Peripherals="DMA, I²S, POR, PWM, WDT", Program Memory Size="128KB (128K x 8)", Program Memory Type=FLASH, RAM Size="16K x 8", Speed=48MHz, Supplier 1=Digi-Key
Y1: "32MHz ±15ppm Crystal 8pF 50 Ohm -40°C ~ 85°C AEC-Q200 Surface Mount 4-SMD, No Lead", ESR (Equivalent Series Resistance)="50 Ohm", Frequency=32MHz, Frequency Stability=±50ppm, Frequency Tolerance=±15ppm, Load Capacitance=8pF, Manufacturer 1="AVX Corp/Kyocera Corp", Manufacturer Part Number 1=CX2520DB32000D0GPSC1, Operating Mode=Fundamental, Operating Temperature="-40°C ~ 85°C", Package / Case="4-SMD, No Lead", Ratings=AEC-Q200, Supplier Part Number 1=1253-1730-1-ND, ComponentLink1Description=http://media.digikey.com/pdf/Data%20Sheets/AVX%20PDFs/CX2520DB_USY1M-H1-16428-00_Spec.pdf, ComponentLink1URL=http://media.digikey.com/pdf/Data%20Sheets/AVX%20PDFs/CX2520DB_USY1M-H1-16428-00_Spec.pdf, Height - Seated (Max)="0.022\" (0.55mm)", Mounting Type="Surface Mount", Packaging="Cut Tape (CT)", Part Status=Active, Size / Dimension="0.098\" L x 0.079\" W (2.50mm x 2.00mm)", Supplier 1=Digi-Key, Type="MHz Crystal"

## Free pads (board coordinates)
  round 2.7 hole 2.7: ""(2.5,2.5) ""(2.5,27.5) ""(2.5,47.5) ""(32.5,2.5) ""(32.5,27.5) ""(47.5,2.5) ""(47.5,47.5)

## Via types
v1: diameter 0.6, hole 0.3, Top Layer to Bottom Layer, 4 vias

## Nets (pads, with @x,y where several pads share a name; then routed paths per layer and width w, separated by ;. In a path a pad name is that pad's centre, name@x,y a point inside that pad or via, vN(x,y) a via of type N, cw(c..) or ccw(c..) an arc to the next point about the centre after c; other vN are vias at no path point)
3V3: C1.1 C3.2 C4.2 C6.2 C7.2 C8.2 C9.2 C10.1 D1.2 J1.1 R1.5 R1.6 R1.7 R1.8 R2.2 TP1.TP U1.3 U3.3 U3.4 U4.1 U4.24 U4.36 U4.48
12V: C11.1 P1.47 P1.48 P1.49 P1.50 P3.1 P4.1 P5.1 R8.1 R9.1 TP2.TP U2.1
BOOT0: R3.2 U4.44
CAN_N: D2.2 P2.2 U1.6
CAN_P: D2.1 P2.1 U1.7
GND: C1.2 C2.2 C3.1 C4.1 C5.1 C6.1 C7.1 C8.1 C9.1 C10.2 C11.2 C12.1 C13.1 C14.1 D2.3 J1.3 J1.5 LED1.2 LED2.2 P1.1 P1.2 P1.3 P1.4 P1.26 P1.27 P1.28 P1.29 P3.2 P4.4 P5.4 Q1.4 Q1.8 Q2.4 Q2.8 R3.1 TP3.TP U1.2 U2.2 U3.2 U3.5 U4.8 U4.23 U4.35 U4.47 Y1.2 Y1.4
NetD1_1: D1.1 U2.3
NetD3_1: D3.1 R1.1
NetD4_1: D4.1 R1.2
NetD5_1: D5.1 R1.3
NetD6_1: D6.1 R1.4
NetLED1_1: LED1.1 R5.2
NetLED2_1: LED2.1 R7.2
NetQ1_3: Q1.3 R4.2
NetQ2_3: Q2.3 R6.2
NRST: C14.2 J1.10 R2.1 U4.7
PA2/USART2_TX: P1.22 U4.12 | length 4.2
  Top Layer w0.254: P1.22 10.475,10.5 U4.12
PA3/USART2_RX: P1.23 U4.13 | length 4.7
  Top Layer w0.254: P1.23 7.325,9.975 U4.13
PA8/RELAY_SENSE_LEFT: P4.3 R8.2 U4.29
PA9/PRECHARGE_RIGHT: R6.1 R7.1 U4.30
PA10/RELAY_SENSE_RIGHT: P5.3 R9.2 U4.31
PA11/CAN_RX: U1.4 U4.32
PA12/CAN_TX: U1.1 U4.33
PA13/SWDIO: J1.2 U4.34
PA14/SWCLK: J1.4 U4.37
PA15: D6.2 U4.38
PB3: D5.2 U4.39
PB4: D4.2 U4.40
PB5: D3.2 U4.41
PB6/USART1_TX: J1.6 U4.42
PB7/USART1_RX: J1.8 U4.43
PB15/PRECHARGE_LEFT: R4.1 R5.1 U4.28
PF0/OSC_IN: C12.2 U4.5 Y1.1 | length 14.1
  Top Layer w0.254: U4.5 v1(12.5,15) ; C12.2 14.904,4.925 Y1.1 ; C12.2@14.904,7.029 v1(14.904,8.154)
  Bottom Layer w0.254: v1(12.5,15) 12.5,8.5 12.846,8.154 v1(14.904,8.154)
PF1/OSC_OUT: C13.2 U4.6 Y1.3 | length 17.1
  Top Layer w0.254: v1(8.75,3.575) C13.2 13.204,3.575 Y1.3 ; v1(8.75,14.5) U4.6
  Bottom Layer w0.254: v1(8.75,3.575) v1(8.75,14.5)
PRECHARGE_GND_LEFT: P4.2 Q1.1 Q1.2 Q1.5 Q1.6 Q1.7
PRECHARGE_GND_RIGHT: P5.2 Q2.1 Q2.2 Q2.5 Q2.6 Q2.7
VDDA: C2.1 C5.2 TP4.TP U3.1 U4.9
pads on no net: J1.7 J1.9 P1. P1.5 P1.6 P1.7 P1.8 P1.9 P1.10 P1.11 P1.12 P1.13 P1.14 P1.15 P1.16 P1.17 P1.18 P1.19 P1.20 P1.21 P1.24 P1.25 P1.30 P1.31 P1.32 P1.33 P1.34 P1.35 P1.36 P1.37 P1.38 P1.39 P1.40 P1.41 P1.42 P1.43 P1.44 P1.45 P1.46 P2.3 P3. P4. P5. U1.5 U1.8 U2.4 U4.2 U4.3 U4.4 U4.10 U4.11 U4.14 U4.15 U4.16 U4.17 U4.18 U4.19 U4.20 U4.21 U4.22 U4.25 U4.26 U4.27 U4.45 U4.46

## Silkscreen, mask and mechanical layers (free items; w line width, h text height)
Top Overlay:
  lines w0.254: 0,0 0,30 35,30 35,0 0,0